# Altium PCB PCB2.PcbDoc
Units mil, origin at the board's own origin, x right, y up, seen from the top; angles counter-clockwise.
Board outline 721 x 1489.64 mil, 2 copper layers (Top Layer, Bottom Layer), stack 60.4 mil thick; 26 components, 39 nets, 134 pads, 27 vias.
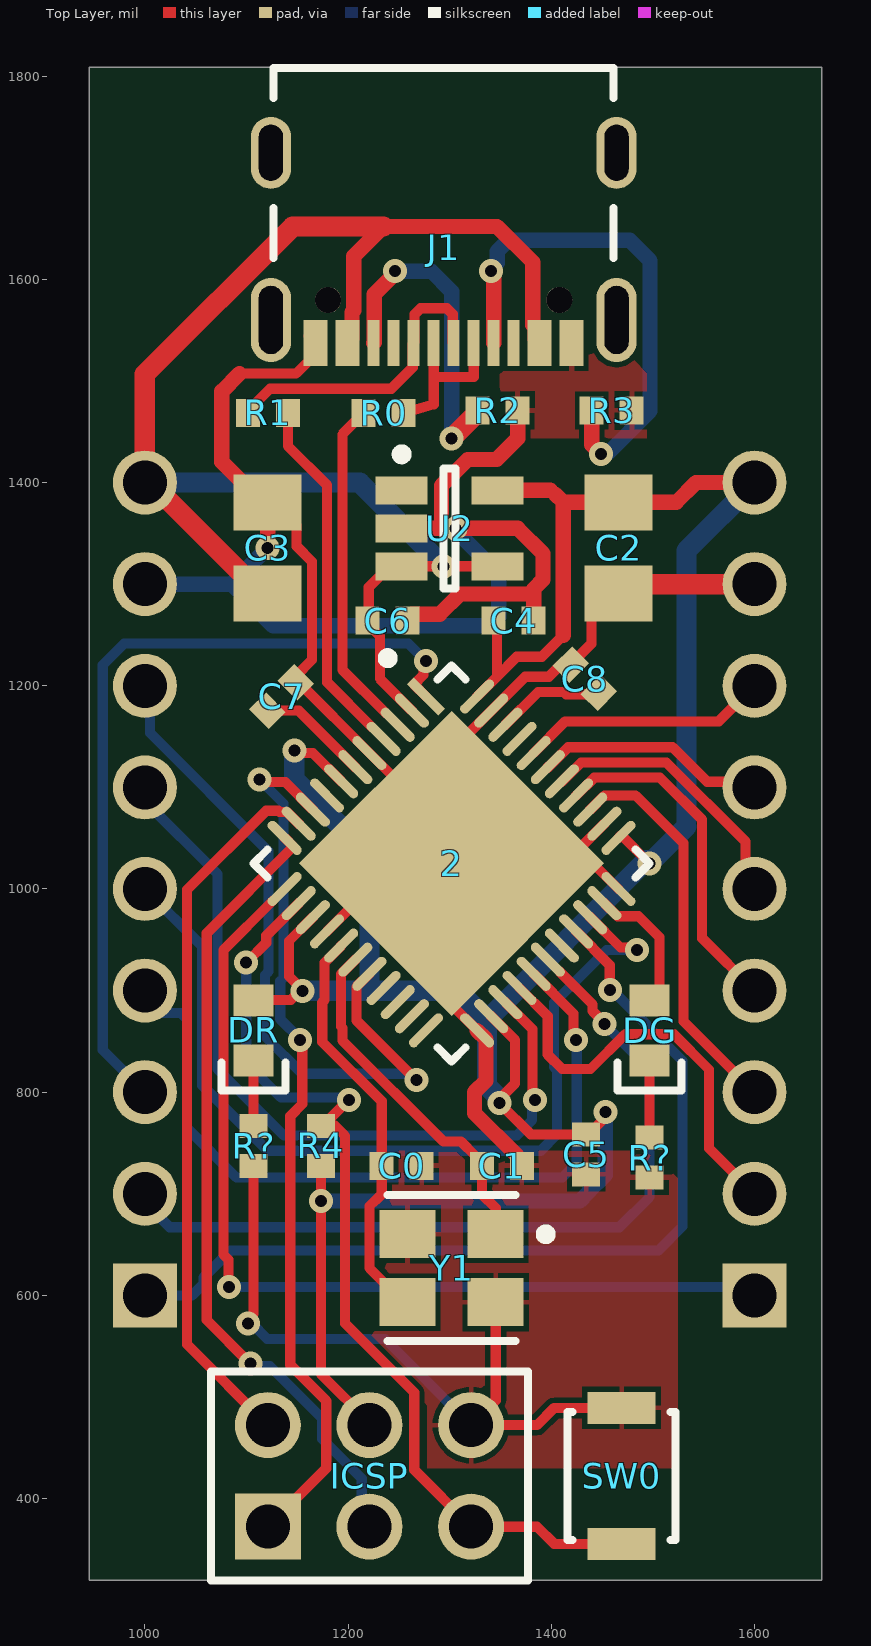
[diagram p0: Top Layer view]
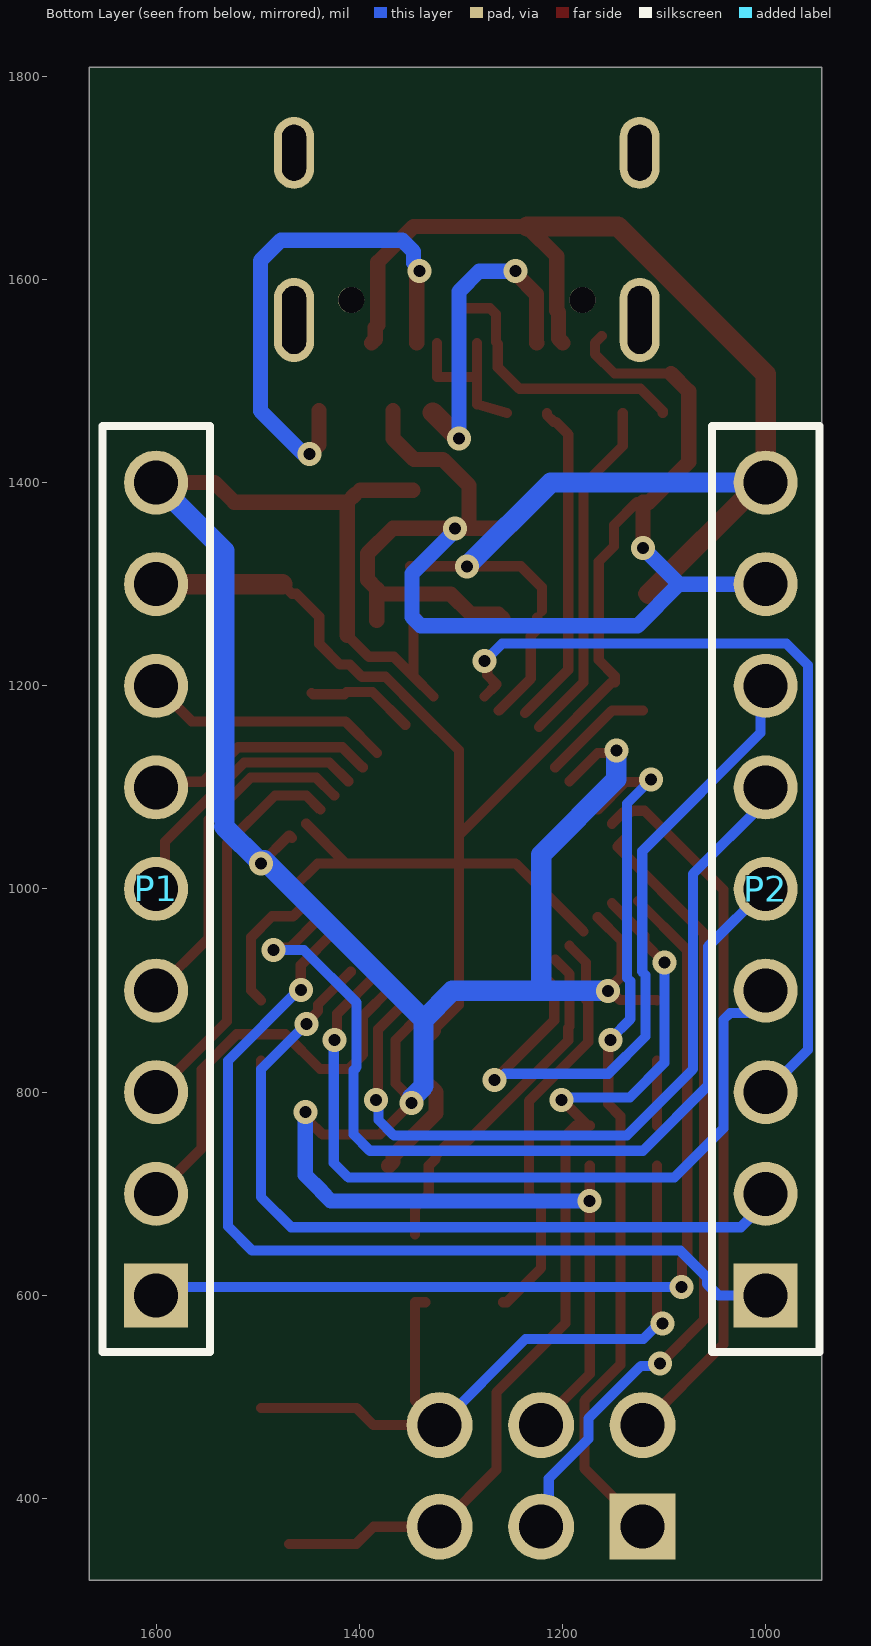
[diagram p1: Bottom Layer view, seen from below]
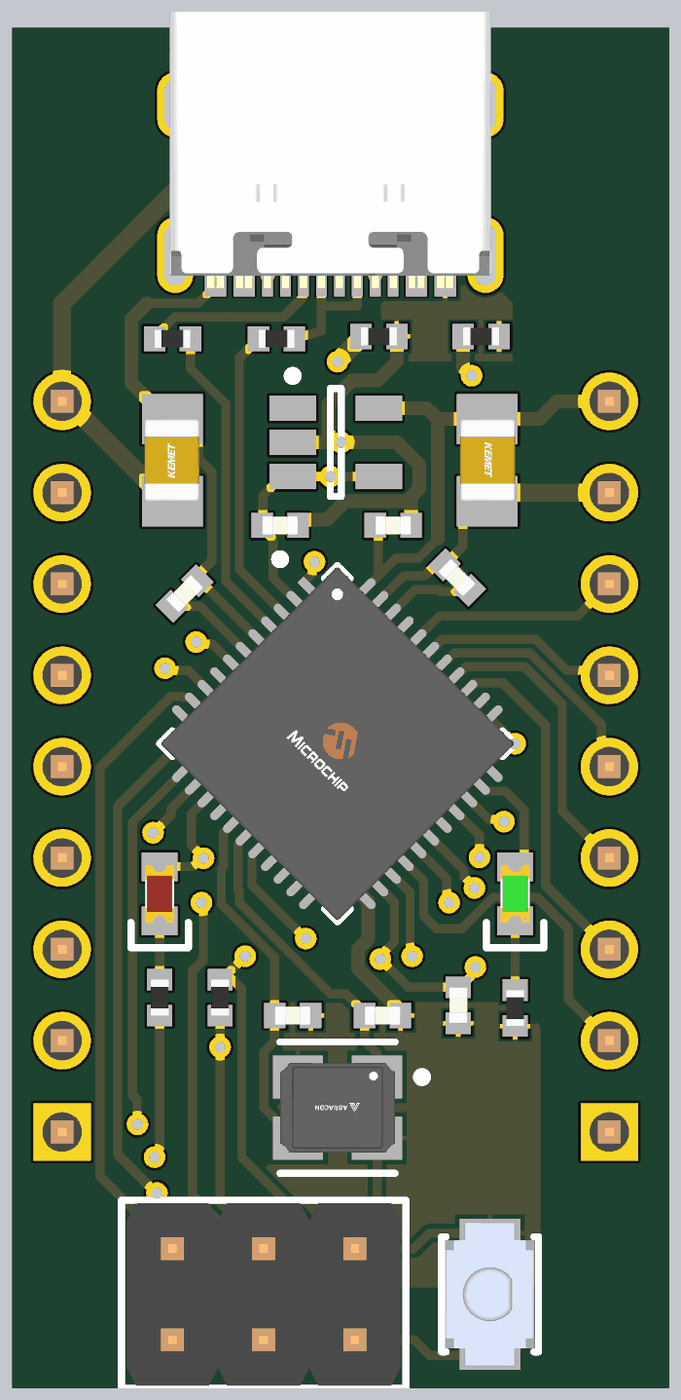
[diagram p2: 3D render of the assembled board from above, using the file's embedded part models]

## Layer stack, top to bottom
Top Solder: solder mask 0.5, Solder Resist, Dk 3.3
Top Layer: signal copper 0.7
Dielectric1: core 59, FR-4, Dk 4.3
Bottom Layer: signal copper 0.7
Bottom Solder: solder mask 0.5, Solder Resist, Dk 3.3

## Board outline
945,319.36 1666,319.36 1666,1809 945,1809

## Design rules (kind name [scope] priority, off if disabled: settings)
BoardOutlineClearance [All] p1: gap=7.87 ignorepadtopadclearanceinfootprint=FALSE
Clearance [All] p1: gap=5 ignorepadtopadclearanceinfootprint=FALSE
ComponentClearance [All] p1: gap=5 collisioncheckmode=3 verticalgap=5 showdistances=TRUE
DiffPairsRouting [All] p1: maxlimit=10 minlimit=5 mostfreqgap=5 toplayer_minwidth=5 toplayer_maxwidth=1000 toplayer_prefwidth=5 bottomlayer_minwidth=5 bottomlayer_maxwidth=1000 bottomlayer_prefwidth=5 maxuncoupledlength=500
Height [All] p1: minheight=0 maxheight=71497.94 prefheight=500
HoleSize [All] p1: absolutevalues=TRUE maxlimit=248.03 minlimit=11.81 maxpercent=80.000 minpercent=20.000
HoleToHoleClearance [All] p1: gap=9.84 allowstackedmicrovias=FALSE
MinimumAnnularRing [All] p1: minimumring=3
MinimumSolderMaskSliver [All] p1: minsoldermaskwidth=0
PlaneClearance [All] p1: clearance=5
PlaneConnect PlaneConnectPowerPads [InPadClass('PowerPads')] p1: planeconnectstyle=Direct reliefexpansion=20 reliefentries=4 reliefconductorwidth=10 reliefairgap=10
PlaneConnect [All] p2: pad.planeconnectstyle=Relief pad.reliefexpansion=11.81 pad.reliefentries=4 pad.reliefconductorwidth=5 pad.reliefairgap=5 via.planeconnectstyle=Direct via.reliefexpansion=11.81 via.reliefentries=4 via.reliefconductorwidth=5 via.reliefairgap=5
PolygonConnect PolygonConnectPowerPads [All vs (InPadClass('PowerPads'))] p1: connectstyle=Direct reliefconductorwidth=10 reliefentries=4 polygonreliefangle="90 Angle" airgapwidth=10
PolygonConnect [All] p2: thpad.connectstyle=Relief thpad.reliefconductorwidth=5 thpad.reliefentries=4 thpad.polygonreliefangle="90 Angle" thpad.airgapwidth=5 smdpad.connectstyle=Relief smdpad.reliefconductorwidth=5 smdpad.reliefentries=4 smdpad.polygonreliefangle="90 Angle" smdpad.airgapwidth=5 via.connectstyle=Direct via.reliefconductorwidth=5 via.reliefentries=4 via.polygonreliefangle="90 Angle" via.airgapwidth=5
RoutingVias [All] p1: holewidth=11.81 width=23.62 viastyle="Through Hole" minholewidth=11.81 minwidth=23.62 maxholewidth=23.62 maxwidth=259.84
SilkToSilkClearance [All] p1: silktosilkclearance=0
SilkToSolderMaskClearance [IsPad] p1: minsilkscreentomaskgap=5 clearancetoexposedcopper=TRUE
SolderMaskExpansion [All] p1: expansion=2.95 istentingtop=FALSE
Width [All] p1: maxlimit=1000 minlimit=10 preferedwidth=10 minimp=50.000000 maximp=50.000000 favimp=50.000000
20 further rules are at their usual default settings.

## Components (designator, comment, footprint, x,y, rotation, side; value= is the part's Value field where it differs from the comment)
2 "ATMEGA32U4RC-MUR" FP-44PW-IPC_A 1301.82,1025.14 r315 top (schematic designator U1)
C0 "22pF" CAP_0402 1252.76,727.5 r180 top
C1 "22pF" CAP_0402 1351.32,727.5 r180 top
C2 "10uF" CAP_0805 1466.16,1335.6 r270 top
C3 "10uF" CAP_0805 1120.87,1335.6 r90 top
C4 "1uF" CAP_0402 1363.02,1264.14 r0 top
C5 ".1uF" CAP_0402 1434.37,738.78 r270 top
C6 "1uF" CAP_0402 1239.01,1264.14 r0 top
C7 "1uF" CAP_0402 1134.51,1189.47 r45 top
C8 ".1uF" CAP_0402 1432.97,1206.93 r135 top
DG "GREEN" LED_0603_GREEN 1496.69,860.81 r90 top
DR "RED" LED_0603_RED 1106.95,860.81 r90 top
ICSP "61300621121" 61300621121 1221.01,422.31 r0 top
J1 "USB4105-GF-A-060" USB4105-GF-A-060 1294.12,1631 r180 top
P1 "61300911121" 61300911121 1600,1000 r90 bottom
P2 "61300911121" 61300911121 1000,1000 r90 bottom
R0 "22" RES_0402 1235.06,1468.49 r180 top
R1 "22" RES_0402 1121.01,1468.49 r0 top
R2 "5.1K" RES_0402 1347.24,1470.99 r0 top
R3 "5.1K" RES_0402 1459.42,1470.99 r0 top
R4 "10k" RES_0402 1173.19,747.19 r90 top
R? "1k" RES_0402 1106.95,747.19 r90 top
R? "1k" RES_0402 1496.69,735.69 r90 top
SW0 "B3U-1000P" FP-B3U-1000P-MFG 1469.14,422.31 r270 top
U2 "LM4120AIM5-5.0/NOPB" MF05A_M 1300,1355 r0 top
Y1 "16Mhz" FP-ABM8G-MFG 1302,626.69 r180 top

## Footprints (in the part's own frame and the unit in brackets; to place one, negate y for a bottom-side part, rotate by r counter-clockwise, add the part's x,y. Pads: shape width x height; smd on the part's side, far side on the other; paste and mask are expansions set on the pad)
61300621121 [mm] "Pin Header, pitch 2.54 mm, THT, Vertical, dual row, 6p"
  rect 1.65x1.65 hole 1.1: 1(-2.54,-1.27)
  round 1.65 hole 1.1: 2(-2.54,1.27) 3(0,-1.27) 4(0,1.27) 5(2.54,-1.27) 6(2.54,1.27)
  silkscreen extent -3.96,-2.62 3.96,2.61, body extent -3.81,-2.54 3.81,2.54, height 8.59
61300911121 [mm] "Pin Header, pitch 2.54 mm, THT, Vertical, single row, 9p"
  rect 1.6x1.6 hole 1.1: 1(-10.16,0)
  round 1.6 hole 1.1: 2(-7.62,0) 3(-5.08,0) 4(-2.54,0) 5(0,0) 6(2.54,0) 7(5.08,0) 8(7.62,0) 9(10.16,0)
  silkscreen extent -11.58,-1.34 11.58,1.35, body extent -11.43,-1.27 11.43,1.27, height 8.57
CAP_0402 [mm]
  rect 0.6x0.7 smd: 1(-0.5,0) 2(0.5,0)
  body extent -0.5,-0.26 0.5,0.26, height 0.37
CAP_0805 [mm]
  rect 1.4x1.7 smd: 1(-1.143,0) 2(1.143,0)
  body extent -1.15,-0.76 1.15,0.79, height 1.01
FP-44PW-IPC_A [mm]
  rect 1.106x0.239 smd paste+0 mask+0: 1(-3.403,2.5)
  rrect100% 1.106x0.239 smd paste+0 mask+0: 2(-3.403,2) 3(-3.403,1.5) 4(-3.403,1) 5(-3.403,0.5) 6(-3.403,0) 7(-3.403,-0.5) 8(-3.403,-1) 9(-3.403,-1.5) 10(-3.403,-2) 11(-3.403,-2.5) 23(3.403,-2.5) 24(3.403,-2) 25(3.403,-1.5) 26(3.403,-1) 27(3.403,-0.5) 28(3.403,0) 29(3.403,0.5) 30(3.403,1) 31(3.403,1.5) 32(3.403,2) 33(3.403,2.5)
  rrect100% 0.239x1.106 smd paste+0 mask+0: 12(-2.5,-3.403) 13(-2,-3.403) 14(-1.5,-3.403) 15(-1,-3.403) 16(-0.5,-3.403) 17(0,-3.403) 18(0.5,-3.403) 19(1,-3.403) 20(1.5,-3.403) 21(2,-3.403) 22(2.5,-3.403) 34(2.5,3.403) 35(2,3.403) 36(1.5,3.403) 37(1,3.403) 38(0.5,3.403) 39(0,3.403) 40(-0.5,3.403) 41(-1,3.403) 42(-1.5,3.403) 43(-2,3.403) 44(-2.5,3.403)
  rect 5.4x5.4 smd paste-1000 mask+0: 45(0,0)
  silkscreen extent -4.88,-3.5 3.5,3.5, body extent -4.46,-4.46 4.46,4.46, height 0.25
FP-ABM8G-MFG [mm]
  rect 1.4x1.2 smd paste+0 mask+0: 1(-1.1,-0.85) 2(1.1,-0.85) 3(1.1,0.85) 4(-1.1,0.85)
  silkscreen extent -2.48,-1.83 1.6,1.82, body extent -1.9,-1.55 1.9,1.55, height 0.25
FP-B3U-1000P-MFG [mm]
  rect 0.8x1.7 smd paste+0 mask+0: 1(-1.7,0) 2(1.7,0)
  silkscreen extent -1.6,-1.35 1.6,1.35, body extent -2.2,-1.45 2.2,1.45, height 0.25
LED_0603_GREEN [mm]
  rect 0.8x1 smd: A(0.75,0) K(-0.75,0)
  silkscreen extent -1.5,-0.8 -0.8,0.8, body extent -0.8,-0.4 0.8,0.4, height 0.6
LED_0603_RED [mm]
  rect 0.8x1 smd: A(0.75,0) K(-0.75,0)
  silkscreen extent -1.5,-0.8 -0.8,0.8, body extent -0.8,-0.4 0.8,0.4, height 0.6
MF05A_M [mm] "SOT23, 5-Leads, Body 2.9x1.6mm, Pitch 0.95mm, Lead Span 2.8mm, IPC Low Density"
  rect 1.3x0.7 smd: 1(-1.2,0.95) 2(-1.2,0) 3(-1.2,-0.95) 4(1.2,-0.95) 5(1.2,0.95)
  silkscreen extent -1.32,-1.5 0.15,1.97, body extent -0.83,-1.49 0.83,1.5, height 1.19
RES_0402 [mm]
  rect 0.6x0.7 smd: 1(-0.5,0) 2(0.5,0)
  body extent -0.5,-0.25 0.5,0.25, height 0.3
USB4105-GF-A-060 [mm]
  rect 0.6x1.15 smd mask+0.05: A1B12(-3.2,2.378) A4B9(-2.4,2.378) B1A12(3.2,2.378) B4A9(2.4,2.378)
  rect 0.3x1.15 smd mask+0.05: A5(-1.25,2.378) A6(-0.25,2.378) A7(0.25,2.378) A8(1.25,2.378) B5(1.75,2.378) B6(0.75,2.378) B7(-0.75,2.378) B8(-1.75,2.378)
  round 0.65 hole 0.65 unplated mask+0.05: MH(-2.89,1.303) MH(2.89,1.303)
  oval 1x1.8 hole 0.6 slot 1.4 at 90 deg: SH(-4.32,-2.377) SH(4.32,-2.377)
  oval 1x2.1 hole 0.6 slot 1.7 at 90 deg: SH(-4.32,1.802) SH(4.32,1.802)
  silkscreen extent -4.25,-4.5 4.25,0.25, body extent -4.47,-4.97 4.47,2.73, height 3.27

## Part data
2: library part CMP-06276-000241-1, "IC MCU 8BIT 32KB FLASH 44VQFN", Case/Package=VQFN, Frequency=16MHz, Max Operating Temperature=85°C, Min Operating Temperature=-40°C, Core Architecture=AVR, Interface=I2C, Memory Size=32KB, Memory Type=FLASH, Number of I/Os=26, Oscillator Type=Internal, Packaging="Tape and Reel", Peripherals="Brown-out Detect/Reset", RoHS Compliant=Yes
C0 C1: library part CAP_0402_10V, "Capacitor SMD 0402 10V"
C2 C3: library part CAP_0805_16V, "Capacitor SMD 0805 16V"
C4 C5 C6 C7 C8: library part CAP_0402_6V3, "Capacitor SMD 0402 6V3"
DG: library part LED_0603_GREEN, "LED 0603 GREEN SMD"
DR: library part LED_0603_RED, "LED 0603 RED SMD"
ICSP: library part CMP-1502-01072-1, "THT Vertical Pin Header WR-PHD, Pitch 2.54 mm, Dual Row, 6 pins", Contact Resistance=20mOhm, Manufacturer="Wurth Elektronik", Operating Temperature=-40to105degC, Rated Current=3A, Withstanding Voltage=500VAC, Working Voltage=250VAC, Datasheet URL=https://katalog.we-online.de/em/datasheet/6130xx21121.pdf, Gender=Male, Manufacturer URL=http://www.we-online.de, Mounting Technology=THT, Orientation=Vertical, Package Reference=61300621121, Packaging=Bag, Part Number=61300621121, Pin Number=6, Pitch=2.54mm, Publisher=WurthElektronik, Row Number=Dual
J1: "USB Connector Type C SMT 12 Pin", Manufacturer=GCT, Manufacturer Part Number=USB4105-GF-A-060
P1 P2: library part CMP-1502-01080-1, "THT Vertical Pin Header WR-PHD, Pitch 2.54 mm, Single Row, 9 pins", Contact Resistance=20mOhm, Manufacturer="Wurth Elektronik", Operating Temperature=-40to105degC, Rated Current=3A, Withstanding Voltage=500VAC, Working Voltage=250VAC, Datasheet URL=https://katalog.we-online.de/em/datasheet/6130xx11121.pdf, Gender=Male, Manufacturer URL=http://www.we-online.de, Mounting Technology=THT, Orientation=Vertical, Package Reference=61300911121, Packaging=Bag, Part Number=61300911121, Pin Number=9, Pitch=2.54mm, Publisher=WurthElektronik, Row Number=Single
R0 R1 R2 R3 R4 R? R?: library part RES_0402, "Resistor SMD 0402"
SW0: library part CMP-2100-03586-2, "SWITCH TACTILE SPST-NO 0.05A 12V", Contact Current Rating=50mA, Contact Resistance=100mR, Insulation Resistance=100MR, Max Operating Temperature=70°C, Max Voltage Rating (DC)=12V, Min Operating Temperature=-25°C, Operating Force=1.5N, Package Quantity=1, Ratings="Dust Proof", Actuator Length=0.4mm, Actuator Type=Standard, Contact Material=Silver, Current Rating=50mA, Depth=2.5mm, Electrical Life=200000Cycles, Height=1.2mm, Illumination Type=Non-Illuminated, Lead Free="Lead Free", Length=4mm, Max Current Rating=50mA, Mechanical Life=200000Cycles, Mount="Surface Mount", Orientation=Straight, Packaging="Tape and Reel", Switch Function=Off-Mom, Switch Travel=0.15mm, Termination=SMD/SMT, Throw Configuration=SPST, Voltage Rating (DC)=12V, Weight=0.000776oz, Width=3mm
U2: library part CMP-0074-00179-2, "Precision Micropower Low Dropout Voltage Reference, 5-pin SOT-23, Pb-Free", Manufacturer="National Semiconductor", PackageTopMarking=R18A*XTT, PowerWise=Y, ComponentLink1Description="LM4120 Datasheet", ComponentLink1URL=http://www.national.com/ds/LM/LM4120.pdf, ComponentLink2Description="LM4120 Web Page", ComponentLink2URL=http://www.national.com/pf/LM/LM4120.html, ComponentLink3Description="MF05A Package Page", ComponentLink3URL=http://www.national.com/packaging/folders/mf05a.html, CompType="Voltage Reference IC", DatasheetVersion=Mar-2005, PackageDescription="Molded SOT-23, .115 x .063 x .040 in Body, 5 Lead, .0375 in Pitch", PackageReference=MF05A, PackageVersion="revD, Aug-2008", PinCount=5, RevisionNote="Component URLs added", RoHS=Y
Y1: library part CMP-27762-006537-2, "Crystal 16MHz ±20ppm (Tol) ±30ppm (Stability) 18pF FUND 80Ω 4-Pin SMD T/R", Case/Package=CSMD, ESR (Equivalent Series Resistance)=80R, Frequency=16MHz, Frequency Stability=30ppm, Frequency Tolerance=20ppm, Load Capacitance=18pF, Max Operating Temperature=85°C, Min Operating Temperature=-40°C, Operating Frequency="16 MHz", Package Quantity=1000, Depth=2.5mm, Height=1mm, Lead Free="Lead Free", Length=3.2mm, Mount="Surface Mount", Number of Pins=4, Packaging="Tape and Reel", Radiation Hardening=No, Series=ABM8G, Series Resistance=80R, Termination=SMD/SMT, Tolerance=20ppm, Width=2.5mm

## Via types
v1: diameter 23.62, hole 11.81, Top Layer to Bottom Layer, 27 vias

## Nets (pads, with @x,y where several pads share a name; then routed paths per layer and width w, separated by ;. In a path a pad name is that pad's centre, name@x,y a point inside that pad or via, vN(x,y) a via of type N, cw(c..) or ccw(c..) an arc to the next point about the centre after c; other vN are vias at no path point)
A0: 2.36 P1.3 | length 391
  Top Layer w10: 2.36 1452.24,1092.04 1483.03,1092.04 1530.13,1044.94 1530.13,869.87 P1.3
A1: 2.37 P1.4 | length 337.9
  Top Layer w10: 2.37 1424.81,1092.04 1442.32,1109.55 1507.03,1109.55 1548.44,1068.13 1548.44,951.56 P1.4
A2: 2.38 P1.5 | length 271
  Top Layer w10: 2.38 1410.89,1105.96 1429.48,1124.55 1513.24,1124.55 1591.29,1046.5 1591.29,1008.71 P1.5
A3: 2.39 P1.6 | length 228
  Top Layer w10: 2.39 1396.97,1119.88 1416.64,1139.55 1519.45,1139.55 1553.5,1105.5 1594.5,1105.5 P1.6
A4: 2.40 P1.7 | length 244.8
  Top Layer w10: 2.40 1413.76,1164.91 1564.91,1164.91 P1.7
A5: 2.41
D2: 2.19
D3: 2.18 P2.7 | length 698.1
  Top Layer w10: 2.18 1208.15,903.63 1208.15,870.71 v1(1267.13,811.73)
  Bottom Layer w10: P2.7 1005.18,1194.82 1005.18,1153.5 1121.49,1037.19 1121.49,918.6 1118.25,915.36 1118.25,854.82 1154.87,818.2 1256.97,818.2 1263.44,811.73 v1(1267.13,811.73)
D4: 2.25 P2.6 | length 779
  Top Layer w10: 2.25 1381.47,861.98 1381.47,794.73 v1(1383.74,792.46)
  Bottom Layer w10: P2.6 1000,1086.41 1071.52,1014.89 1071.52,822.67 1136.8,757.39 1365.93,757.39 1381.13,772.6 1381.13,789.86 v1(1383.74,792.46)
D5: 2.31 P2.5 | length 892.8
  Top Layer w10: 2.31 1468.1,942.38 1481.87,942.38 v1(1484.48,939.77)
  Bottom Layer w10: P2.5 1056.52,943.48 1056.52,806.67 1120.8,742.39 1389.57,742.39 1405.55,758.37 1405.55,821.7 1402.59,824.66 1402.59,887.99 1454.38,939.77 v1(1484.48,939.77)
D6: 2.27 P2.4 | length 786.5
  Top Layer w10: 2.27 1421.79,877.33 1421.79,853.73 v1(1424.4,851.12)
  Bottom Layer w10: P2.4 1000,878 1035,878 1041.52,871.48 1041.52,764.48 1089.99,716.01 1410.75,716.01 1425.08,730.34 1425.08,850.44 v1(1424.4,851.12)
D7: 2.1 P2.3 | length 816.2
  Top Layer w10: 2.1 1265.03,1201.13 1265.03,1201.54 1274.08,1210.59 1274.08,1221.67 v1(1276.68,1224.28)
  Bottom Layer w10: P2.3 958.5,841.5 958.5,1220.5 979.5,1241.5 1259.47,1241.5 v1(1276.68,1224.28)
D8: 2.28 P2.2 | length 786.1
  Top Layer w10: 2.28@1408.42,918.54 1440.65,886.31 1440.65,879.79 1452.12,868.33 v1(1452.12,867.12)
  Bottom Layer w10: P2.2 1000,691.47 1024.47,667 1467,667 1496.69,696.7 1496.69,822.54 v1(1452.12,867.12)
D9: 2.29
D10: 2.30 P2.1 | length 895.9
  Top Layer w10: 2.30 1457.59,925.05 v1(1457.59,900.66)
  Bottom Layer w10: P2.1 1046.5,600 1057.58,611.08 1057.58,617.42 1084.16,644 1505.3,644 1529.18,667.88 1529.18,831.02 1459.54,900.66 v1(1457.59,900.66)
D11: 2.12 P1.1 | length 922.8
  Top Layer w10: v1(1082.64,608.39) 1082.26,608.76 1082.26,635.2 1077.26,640.2 1077.26,939.77 2.12@1125.63,988.14
  Bottom Layer w10: v1(1082.64,608.39) 1591.61,608.39 P1.1
D12: 2.26 P1.2 | length 411.2
  Top Layer w10: 2.26 1396.47,874.81 1396.47,836.92 1410.65,822.74 1438.58,822.74 1472.87,857.03 1520.52,857.03 1555.19,822.36 1555.19,744.81 P1.2
D13: 2.32 DG.A | length 134.4
  Top Layer w10: 2.32 1465.09,973.22 1485.83,973.22 1506.44,952.61 1506.44,900.08 DG.A
D+: 2.4 R1.2 | length 343
  Top Layer w10: R1.2 1140.69,1435.95 1179.33,1397.3 1179.33,1203.31 2.4@1223.07,1159.58
D-: 2.3 R0.2 | length 322.7
  Top Layer w10: R0.2 1215.37,1466.52 1208.56,1459.71 1206.59,1459.71 1194.33,1447.45 1194.33,1215.73 2.3@1236.78,1173.29
GND: 2.5 2.15 2.23 2.33 2.35 2.43 2.45 C0.1 C1.1 C2.2 C3.2 C4.2 C5.2 C6.2 C7.2 C8.2 ICSP.6 J1.A1B12 J1.B1A12 P1.8 P2.8 R2.2 R3.2 R?.1 SW0.1 U2.2 Y1.2 Y1.4 | length 3711.4
  Top Layer w10: 1093.23,1507.27 1148.84,1507.27 1168.14,1526.57 J1.B1A12 J1.B1A12@1161.32,1544.21 ; v1(1101.32,572.46) 1101.32,576.14 1106.95,581.77 R?.1@1106.95,727.5 ; C3.2@1126.77,1380.6 1149.33,1358.04 1149.33,1337.3 1164.33,1322.3 1164.33,1225.41 1148.43,1209.5 C7.2 1151.41,1203.39 2.5 2.45@1301.82,1052.98 ; 2.15 1246.15,1025.14 2.45 ; 2.23 1301.82,885.95 2.45 ; Y1.4@1334.77,593.23 Y1.4 1345.31,496.62 ICSP.6 1386,472.32 1402.93,489.24 SW0.1 SW0.1@1496.69,489.24 ; 2.35 2.45@1413.18,1025.14 ; 2.33 1441.02,1025.14 2.45@1413.18,1025.14 ; C2.2@1475.56,1300 C2.2 1461.96,1290.6 1439.41,1268.04 1439.41,1241.2 C8.2 1409.42,1220.85 1397.45,1208.88 1374.2,1208.88 2.43 1301.82,1136.49 2.45@1301.82,1052.98 ; 2.45 2.45@1301.82,1052.98 ; 2.45 2.45@1413.18,1025.14
  Top Layer w15: 1093.23,1507.27 1075.73,1489.77 1075.73,1420.23 1094.9,1401.05 1094.9,1400.66 1114.96,1380.6 C3.2 v1(1120.87,1335.6) ; U2.2 1292,1355 ; C6.2 1258.69,1266.09 1263,1270.4 1290.12,1270.4 1310.08,1290.37 1326.29,1290.37 1326.34,1290.42 1360.32,1290.42 1360.37,1290.37 1382.41,1290.37 ; 2.23 1335.64,852.12 1335.64,811.21 1324.46,800.03 1324.46,779.24 1366.69,737 1366.69,731.81 C1.1 ; R2.2 1366.93,1443.46 1346.26,1422.8 1317.8,1422.8 1292,1397 1292,1359.28 1296.28,1355 v1(1305.91,1355) 1366.89,1355 1391.8,1330.09 1391.8,1304.41 1382.41,1295.01 1382.41,1290.37 ; C4.2 1382.7,1290.37 1382.41,1290.37
  Top Layer w20: C2.2@1475.56,1300 P1.8
  Bottom Layer w10: v1(1101.32,572.46) 1105.01,572.46 1120.46,557 1236.32,557 ICSP.6
  Bottom Layer w15: P2.8 1085.27,1300 ; v1(1120.87,1335.6) 1085.27,1300 ; v1(1305.91,1355) 1305.91,1352.67 1348.2,1310.37 1348.2,1267.78 1339.41,1259 1126.27,1259 1085.27,1300
MISO: 2.11 ICSP.3 | length 792.9
  Top Layer w10: v1(1103.93,533.14) 1103.36,533.14 1060.83,575.67 1060.83,956.56 1145.81,1041.55 1145.81,1041.95 2.11
  Bottom Layer w10: v1(1103.93,533.14) 1106.53,530.54 1122.86,530.54 1174.55,478.85 1174.55,458.7 1213.45,419.8 1213.45,379.87 ICSP.3
MOSI: 2.10 ICSP.2 | length 707.3
  Top Layer w10: ICSP.2 1041.5,551.83 1041.5,999.22 1119.33,1077.06 1131.52,1077.06 1132.72,1075.85 1139.75,1075.85 2.10
NetC8_1: 2.42 C8.1 | length 107
  Top Layer w10: 2.42 1387.04,1193.88 1412.4,1193.88 1414.66,1191.62 1445.5,1191.62 C8.1
NetDG_K: DG.K R?.2@1496.69,755.38 | length 75.9
  Top Layer w10: R?.2@1496.69,755.38 DG.K
NetDR_K: DR.K R?.2@1106.95,766.87 | length 64.4
  Top Layer w10: R?.2@1106.95,766.87 DR.K
NetJ1_A5: J1.A5 R3.1 | length 517.6
  Top Layer w10: v1(1340.88,1608) v1@1343.33,1605.55
  Top Layer w15: J1.A5 v1@1343.33,1605.55 ; R3.1 1439.74,1437.26 v1(1449,1428)
  Bottom Layer w15: v1(1340.88,1608) 1340.88,1610.33 1346.74,1616.19 1346.74,1627.48 1357.8,1638.54 1477.1,1638.54 1497.25,1618.39 1497.25,1470.39 1456.51,1429.65 1450.65,1429.65 v1(1449,1428)
NetJ1_A6: J1.A6 J1.B6 R1.1 | length 306.3
  Top Layer w10: R1.1 1101.32,1470.46 1123.13,1492.27 1231.33,1492.27 1242.47,1492.27 1263.69,1513.49 1263.69,1536.49 J1.B6 1265.5,1538.3 1265.5,1565.73 1271.35,1571.59 1297.2,1571.59 1303.06,1565.73 1303.06,1538.3 J1.A6
NetJ1_A7: J1.A7 J1.B7 R0.1 | length 163.9
  Top Layer w10: R0.1 1284.28,1477 1284.28,1504 ; J1.A7 1284.28,1504 ; J1.B7 1323.65,1504 1284.28,1504
NetJ1_B5: J1.B5 R2.1 | length 326.2
  Top Layer w10: R2.1@1327.56,1469.02 R2.1
  Top Layer w15: J1.B5 1225.63,1537.81 1225.63,1585.3 1246,1605.67 v1(1246,1608)
  Top Layer w20: v1(1301.97,1443.43) R2.1@1327.56,1469.02
  Bottom Layer w15: v1(1246,1608) 1282,1608 1301.97,1588.03 v1(1301.97,1443.43)
Raw: 2.2 C3.1 C6.1 J1.A4B9 J1.B4A9 P2.9 U2.3 U2.4 | length 1535.6
  Top Layer w10: P2.9 P2.9@1005.56,1400 ; C3.1@1114.96,1290.6 C3.1 ; C6.1@1218.92,1261.43 1220.07,1261.43 1226.13,1255.36 1226.13,1254.22 1231.3,1249.05 1231.3,1207.01 2.2 ; C6.1@1220.25,1273.56 1220.25,1296.91 1240.94,1317.6 U2.3 v1(1294.1,1317.6) U2.4 U2.4@1350.22,1317.6 ; C6.1@1224.78,1267.29 C6.1@1225,1267.29
  Top Layer w15: J1.B4A9 1203.94,1541.71 1203.94,1567.55 1205.63,1569.24 1205.63,1622.82 1234.82,1652 1346.61,1652 1381.79,1616.81 1381.79,1555.04 1384.3,1552.54 1384.3,1541.11 J1.A4B9@1388.01,1537.4
  Top Layer w20: P2.9 1000,1506.7 1145.3,1652 1234.82,1652 ; P2.9@1005.56,1400 C3.1@1114.96,1290.6
  Bottom Layer w20: P2.9 1211.7,1400 v1(1294.1,1317.6)
RESET: 2.13 ICSP.5 R4.2 SW0.2 | length 950.3
  Top Layer w10: v1(1099.68,927.64) 1100.03,927.64 1119.44,947.04 1119.44,954.11 2.13 ; R4.2 1187.13,766.87 1197,757 1197,572.46 1265.03,504.43 1265.03,428.29 ICSP.5 1386,372.32 1402.93,355.39 SW0.2 ; R4.2@1175.16,766.87 v1(1200.75,792.46)
  Bottom Layer w10: v1(1099.68,927.64) 1099.68,828.85 1133.79,794.73 1198.48,794.73 v1(1200.75,792.46)
RX: 2.20
SCK: 2.9 ICSP.1 | length 863.9
  Top Layer w10: v1(1112.8,1107.82) 1115.4,1105.21 1138.23,1105.21 2.9 ; ICSP.1 1178.49,429.8 1178.49,496.12 1143,531.61 1143,776.42 1154.87,788.29 1154.87,849.04 v1(1152.79,851.12)
  Bottom Layer w10: v1(1112.8,1107.82) 1136.49,1084.12 1136.49,912.39 1133.25,909.15 1133.25,871.87 1152.79,852.32 v1(1152.79,851.12)
TX: 2.21
UCap: 2.6 C7.1 | length 109.6
  Top Layer w10: C7.1 1151.41,1175.55 2.6
VCC: 2.7 2.14 2.24 2.34 2.44 C2.1 C4.1 C5.1 DR.A ICSP.4 P1.9 R4.1 U2.5 | length 2847.3
  Top Layer w10: DR.A 1107.27,890.65 1143.53,890.65 1152.56,899.68 1156.25,899.68 1141.9,914.03 1141.9,948.73 2.14 ; v1(1147.04,1136.49) 1149.64,1133.89 1165.24,1133.89 2.7 ; R4.1 v1(1173.19,693) 1173.19,522.63 1221.01,474.82 ICSP.4 ; 2.44 1346.48,1208.99 ; 2.24 1364.43,851.18 1364.43,808.65 1348.77,792.99 v1(1348.77,789.31) 1379.61,758.47 C5.1 1436.33,758.47 1450.54,772.67 1450.54,778.03 v1(1453.15,780.64) ; C4.1@1343.33,1267.29 1346.48,1264.14 1346.48,1208.99 ; 1400,1392.4 1403,1389.4 ; 1411.8,1249.78 1390.53,1228.51 1366,1228.51 1346.48,1208.99 ; 2.34 1468.65,1052.77 1469.06,1052.77 v1(1496.69,1025.14)
  Top Layer w15: U2.5 1399,1392.4 ; 1403.71,1388.69 1411.8,1380.6 ; 1411.8,1249.78 1411.8,1380.6 ; P1.9 1542.4,1400 1523,1380.6 C2.1 1411.8,1380.6
  Bottom Layer w15: v1(1173.19,693) 1428.08,693 1436.87,701.79 1436.87,702.29 1453.15,718.57 v1(1453.15,780.64)
  Bottom Layer w20: v1(1147.04,1136.49) 1147.04,1107.82 1221.01,1033.85 1221.01,899.68 ; v1(1155.06,899.68) 1221.01,899.68 ; v1(1348.77,789.31) 1348.08,790 1348.08,794.66 1336.73,806.02 1336.73,871.32 ; v1@1493.62,1028.21 1336.73,871.32 ; v1(1496.69,1025.14) 1533,1061.45 ; 1533,1067.59 1533,1333 P1.9 ; 1221.01,899.68 1308.36,899.68 1336.73,871.32
X1: 2.17 C1.2 Y1.1 | length 349.2
  Top Layer w10: 2.17 1193.15,916.47 1193.15,864.49 1194.33,863.31 1194.33,850.94 1293.99,751.28 1311.25,751.28 1324.82,737.71 1324.82,734.31 C1.2 1331.64,699.67 1345.31,686 Y1.1
X2: 2.16 C0.2 Y1.3 | length 405.9
  Top Layer w10: 2.16 1193.17,943.91 1176.87,927.62 1176.87,890.65 1174.6,888.38 1174.6,849.45 1233.07,790.98 C0.2 1233.07,699.64 1227.21,693.78 1226.99,693.78 1221.13,687.92 1221.13,626.85 1254.76,593.23 Y1.3
pads on no net: 2.8 2.22 J1.A8 J1.B8 J1.MH J1.SH U2.1

## Polygon pours and split planes (outlines as drawn)
GND on Top Layer "GND_L01_P002" (solid, pour order 2): 1215.37,742.18 1215.37,554.08 1278,491.46 1278,429.8 1524.25,429.8 1524.25,443.26 1524.25,467.67 1524.25,742.18
GND on Top Layer "GND_L01_P001" (solid, pour order 1): 1403,1560.04 1403.86,1560.89 1440.91,1560.89 1494,1507.81 1494,1443.43 1357.36,1443.43 1349.36,1451.43 1349.36,1506.55 1403.71,1560.89

## Text inside footprints (layer, text, board x,y; h text height)
DG: Top Assembly "+" at 1472.74,912.65 h19.68 r90
DR: Top Assembly "+" at 1082.99,912.65 h19.68 r90